# EAGLE board relay-shield (EAGLE 6.6.0)
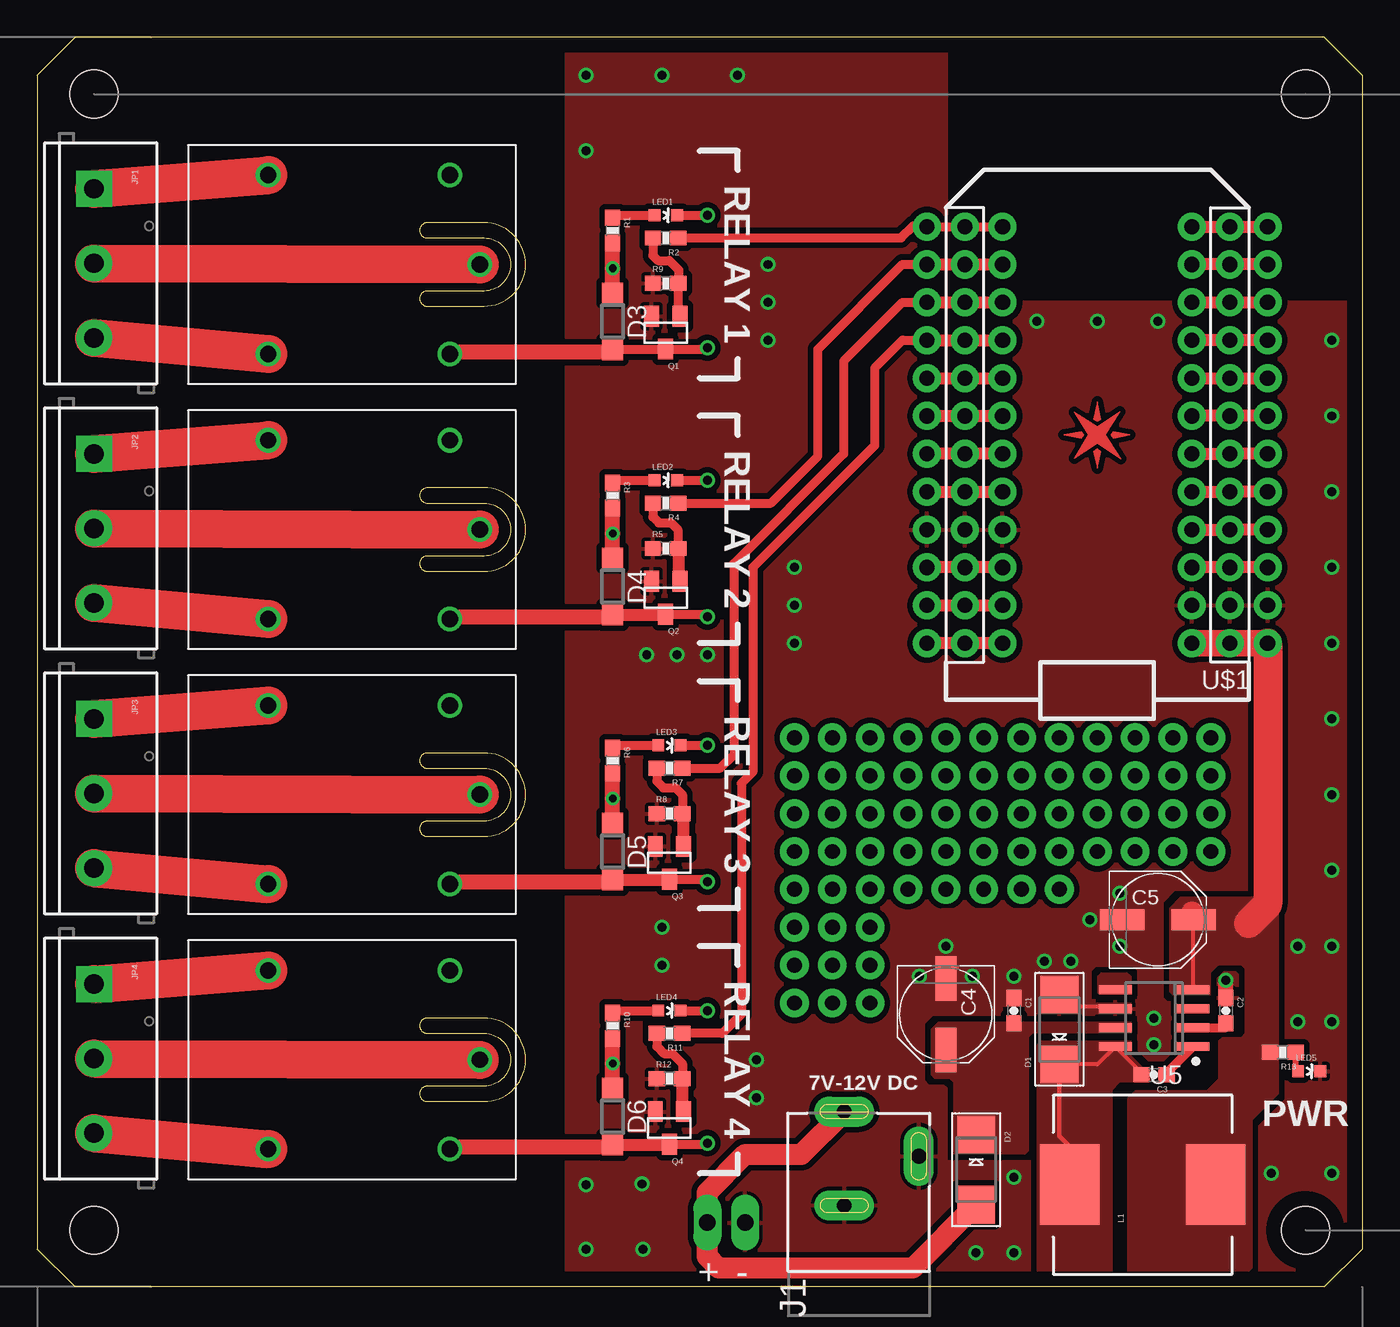
[diagram p0: board, top side]
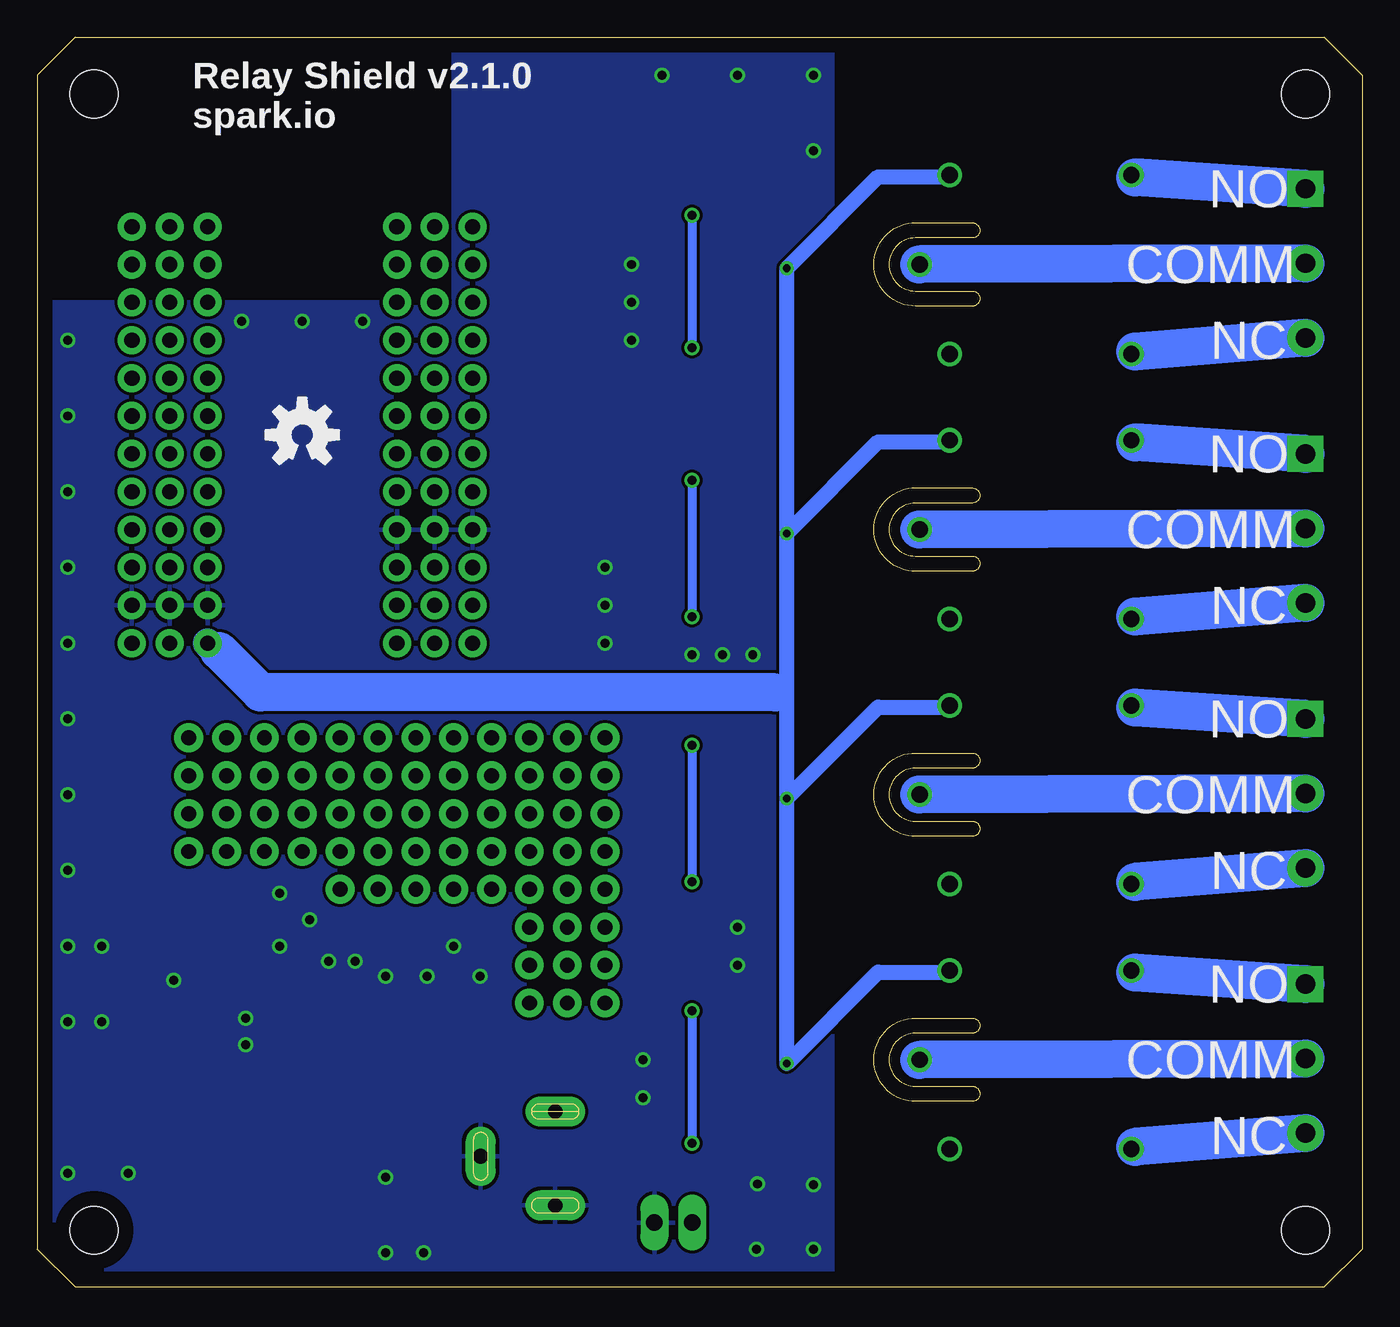
[diagram p1: board, bottom side, seen from below]

Size 88.9 x 83.82 mm. Coordinates in mm from the lower left corner, seen from the top.
Outline: 86.36,83.82 2.54,83.82 0,81.28 0,2.54 2.54,0 86.36,0 88.9,2.54 88.9,81.28 86.36,83.82
Outline: 26.16,70.36 29.97,70.36 arc-90 31.75,68.58 arc-90 29.97,66.8 26.16,66.8 arc180 26.16,65.79 29.97,65.79 arc90 32.77,68.58 arc85 30.23,71.37 26.16,71.37 arc180 26.16,70.36
Outline: 26.16,52.58 29.97,52.58 arc-90 31.75,50.8 arc-90 29.97,49.02 26.16,49.02 arc180 26.16,48.01 29.97,48.01 arc90 32.77,50.8 arc85 30.23,53.59 26.16,53.59 arc180 26.16,52.58
Outline: 26.16,34.8 29.97,34.8 arc-90 31.75,33.02 arc-90 29.97,31.24 26.16,31.24 arc180 26.16,30.23 29.97,30.23 arc90 32.77,33.02 arc85 30.23,35.81 26.16,35.81 arc180 26.16,34.8
Outline: 26.16,17.02 29.97,17.02 arc-90 31.75,15.24 arc-90 29.97,13.46 26.16,13.46 arc180 26.16,12.45 29.97,12.45 arc90 32.77,15.24 arc85 30.23,18.03 26.16,18.03 arc180 26.16,17.02
Copper layers (1*16): Top 0.035mm / dielectric 1.5mm / Bottom 0.035mm
Design rules "default *": minimum track width 10mil, minimum drill 24mil, track to track 8mil, track to pad 8mil, pad to pad 8mil, via to via 8mil, smd to smd 8mil, copper to edge 40mil, drill to drill 8mil, minimum pad ring 10mil, minimum via ring 8mil, stop-mask expansion 4mil, vias tented up to drill 25mil, thermal gap 10mil
Holes 3.2 mm at 3.81,80.01 85.09,80.01 85.09,3.81 3.81,3.81

## Footprints (pad centres in the part's own frame; a part is rotated, then mirrored left to right if it is on the bottom)
0603-CAP = smd 1.1 x 1: 1 -0.85,0; 2 0.85,0
PANASONIC_D = smd 3 x 1.4: + 2.4,0; - -2.4,0
SMADIODE = smd 2.54 x 2.54: A 2.349,0; C -2.349,0
SOD123 = smd 1.4 x 1.4: A 1.9,0; C -1.9,0
POWER_JACK_SLOT = drill 1 pad 2 long: GND@1 2.58,7.5; GND@2 7.58,10.8; PWR 2.58,13.8
SCREWTERMINAL-5MM-3 = drill 1.3 pad 2.413 square: 1 0,0 | drill 1.3 pad 2.413: 2 5,0; 3 10,0
1X02_LONGPADS = drill 1.118 pad 1.88 long: 1 0,0; 2 2.54,0
CDRH125 = smd 5.4 x 4: 1 0,4.9; 2 0,-4.9
LED-0603 = smd 0.8 x 0.8: A 0,-0.75; C 0,0.75
SOT23 = smd 1 x 1.4: 1 -0.95,-1.1; 2 0.95,-1.1; 3 0,1.1
0603-RES = smd 1.1 x 1: 1 -0.85,0; 2 0.85,0
JS1-5V-F = drill 1.1: CLOSED -6.096,-5.994; COIL1 6.096,5.994; COIL2 6.096,-5.994; COMMON 8.103,0; OPEN -6.096,5.994
SO08 = smd 0.6 x 2.2: 1 -1.905,-2.6; 2 -0.635,-2.6; 3 0.635,-2.6; 4 1.905,-2.6; 5 1.905,2.6; 6 0.635,2.6; 7 -0.635,2.6; 8 -1.905,2.6
SPARK_CORE_STACKABLE = drill 1.016 pad 1.88: 1 -8.89,13.97; 2 -8.89,11.43; 3 -8.89,8.89; 4 -8.89,6.35; 5 -8.89,3.81; 6 -8.89,1.27; 7 -8.89,-1.27; 8 -8.89,-3.81; 9 -8.89,-6.35; 10 -8.89,-8.89; 11 -8.89,-11.43; 12 -8.89,-13.97; 13 8.89,-13.97; 14 8.89,-11.43; 15 8.89,-8.89; 16 8.89,-6.35; 17 8.89,-3.81; 18 8.89,-1.27; 19 8.89,1.27; 20 8.89,3.81; 21 8.89,6.35; 22 8.89,8.89; 23 8.89,11.43; 24 8.89,13.97; #1 -6.35,13.97; #2 -6.35,11.43; #3 -6.35,8.89; #4 -6.35,6.35; #5 -6.35,3.81; #6 -6.35,1.27; #7 -6.35,-1.27; #8 -6.35,-3.81; #9 -6.35,-6.35; #10 -6.35,-8.89; #11 -6.35,-11.43; #12 -6.35,-13.97; #13 11.43,-13.97; #14 11.43,-11.43; #15 11.43,-8.89; #16 11.43,-6.35; #17 11.43,-3.81; #18 11.43,-1.27; #19 11.43,1.27; #20 11.43,3.81; #21 11.43,6.35; #22 11.43,8.89; #23 11.43,11.43; #24 11.43,13.97; @1 -11.43,13.97; @2 -11.43,11.43; @3 -11.43,8.89; @4 -11.43,6.35; @5 -11.43,3.81; @6 -11.43,1.27; @7 -11.43,-1.27; @8 -11.43,-3.81; @9 -11.43,-6.35; @10 -11.43,-8.89; @11 -11.43,-11.43; @12 -11.43,-13.97; @13 6.35,-13.97; @14 6.35,-11.43; @15 6.35,-8.89; @16 6.35,-6.35; @17 6.35,-3.81; @18 6.35,-1.27; @19 6.35,1.27; @20 6.35,3.81; @21 6.35,6.35; @22 6.35,8.89; @23 6.35,11.43; @24 6.35,13.97

## Placement (x,y rotation side)
C1  0.1uF  [0603-CAP]  65.53,18.54 270 top
C2  10nF  [0603-CAP]  79.76,18.54 270 top
C3  10nF  [0603-CAP]  74.93,14.22 180 top
C4  100uF, 16V  [PANASONIC_D]  60.96,18.29 270 top
C5  56uF, 10V  [PANASONIC_D]  75.18,24.64 0 top
D1  B230  [SMADIODE]  68.58,17.27 90 top
D2  B230  [SMADIODE]  62.99,7.87 270 top
D3  [SOD123]  38.61,64.77 270 top
D4  [SOD123]  38.61,46.99 270 top
D5  [SOD123]  38.61,29.21 270 top
D6  [SOD123]  38.61,11.43 270 top
E$1  [SPARK_LOGO_PLUS_PLANE]  71.12,57.15 0 top
J1  POWER_JACKSLT  [POWER_JACK_SLOT]  51.56,-2.03 0 top
JP1  [SCREWTERMINAL-5MM-3]  3.81,73.66 270 top
JP2  [SCREWTERMINAL-5MM-3]  3.81,55.88 270 top
JP3  [SCREWTERMINAL-5MM-3]  3.81,38.1 270 top
JP4  [SCREWTERMINAL-5MM-3]  3.81,20.32 270 top
JP5  M02PTH3  [1X02_LONGPADS]  47.5,4.32 180 top
L1  CDRH125NP-470M  [CDRH125]  74.17,6.86 90 top
LED1  RED  [LED-0603]  42.16,71.88 270 top
LED2  RED  [LED-0603]  42.16,54.1 270 top
LED3  RED  [LED-0603]  42.42,36.32 270 top
LED4  RED  [LED-0603]  42.42,18.54 270 top
LED5  BLUE  [LED-0603]  85.34,14.48 270 top
LOGO1  OSHW-LOGOM  [OSHW-LOGO-M]  71.12,57.15 0 bottom
Q1  MPSA42  [SOT23]  42.16,64.01 180 top
Q2  MPSA42  [SOT23]  42.16,46.23 180 top
Q3  MPSA42  [SOT23]  42.42,28.45 180 top
Q4  MPSA42  [SOT23]  42.42,10.67 180 top
R1  1K  [0603-RES]  38.61,70.87 270 top
R2  1K  [0603-RES]  42.16,70.36 180 top
R3  1K  [0603-RES]  38.61,53.09 270 top
R4  1K  [0603-RES]  42.16,52.58 180 top
R5  10K  [0603-RES]  42.16,49.53 0 top
R6  1K  [0603-RES]  38.61,35.31 270 top
R7  1K  [0603-RES]  42.42,34.8 180 top
R8  10K  [0603-RES]  42.42,31.75 0 top
R9  10K  [0603-RES]  42.16,67.31 0 top
R10  1K  [0603-RES]  38.61,17.53 270 top
R11  1K  [0603-RES]  42.42,17.02 180 top
R12  10K  [0603-RES]  42.42,13.97 0 top
R13  1K  [0603-RES]  83.57,15.75 180 top
U1  RELAYPANASONIC-JS  [JS1-5V-F]  21.59,68.58 0 top
U2  RELAYPANASONIC-JS  [JS1-5V-F]  21.59,50.8 0 top
U3  RELAYPANASONIC-JS  [JS1-5V-F]  21.59,33.02 0 top
U4  RELAYPANASONIC-JS  [JS1-5V-F]  21.59,15.24 0 top
U5  LM2672  [SO08]  74.93,18.03 90 top
U$1  SPARK_CORE  [SPARK_CORE_STACKABLE]  71.12,57.15 180 top

## Library data of the parts
C1 = SparkFun-Capacitors; PROD_ID: CAP-08604
C2-C5 = SparkFun-Capacitors
D1 D2 = adafruit
D3-D6 = diode
E$1 J1 LOGO1 U1-U5 U$1 = Spark
JP1-JP5 = SparkFun-Connectors
L1 R1-R13 = SparkFun-Passives
LED1-LED5 = SparkFun-LED
Q1-Q4 = SparkFun-DiscreteSemi; PROD_ID: TRANS-09116

## Nets
+5V: C5.+ D3.C D4.C D5.C D6.C L1.2 R1.2 R3.2 R6.2 R10.2 R13.2 U1.COIL1 U2.COIL1 U3.COIL1 U4.COIL1 U5.4 U$1.1 U$1.#1 U$1.@1
GND: C1.1 C2.1 C4.- C5.- D1.A J1.GND@1 J1.GND@2 JP5.1 LED5.C Q1.2 Q2.2 Q3.2 Q4.2 R5.1 R8.1 R9.1 R12.1 U5.6 U$1.2 U$1.21 U$1.#2 U$1.#21 U$1.@2 U$1.@21
MAIN1: JP1.2 U1.COMMON
MAIN2: JP2.2 U2.COMMON
MAIN3: JP3.2 U3.COMMON
MAIN4: JP4.2 U4.COMMON
N$1: D3.A LED1.C Q1.3 U1.COIL2
N$2: Q2.1 R4.2 R5.2
N$3: Q1.1 R2.2 R9.2
N$4: LED1.A R1.1
N$5: D4.A LED2.C Q2.3 U2.COIL2
N$6: LED2.A R3.1
N$7: Q3.1 R7.2 R8.2
N$8: D5.A LED3.C Q3.3 U3.COIL2
N$9: LED3.A R6.1
N$10: Q4.1 R11.2 R12.2
N$11: D6.A LED4.C Q4.3 U4.COIL2
N$12: LED4.A R10.1
N$13: U$1.17 U$1.#17 U$1.@17
N$14: C1.2 C4.+ D2.C U5.7
N$15: U$1.18 U$1.#18 U$1.@18
N$16: LED5.A R13.1
N$17: U$1.19 U$1.#19 U$1.@19
N$18: U$1.20 U$1.#20 U$1.@20
N$19: U$1.22 U$1.#22 U$1.@22
N$20: U$1.23 U$1.#23 U$1.@23
N$21: U$1.24 U$1.#24 U$1.@24
N$22: U$1.12 U$1.#12 U$1.@12
N$23: U$1.11 U$1.#11 U$1.@11
N$24: U$1.10 U$1.#10 U$1.@10
N$25: U$1.9 U$1.#9 U$1.@9
N$26: U$1.8 U$1.#8 U$1.@8
N$27: U$1.7 U$1.#7 U$1.@7
N$28: U$1.6 U$1.#6 U$1.@6
N$29: U$1.5 U$1.#5 U$1.@5
N$30: U$1.4 U$1.#4 U$1.@4
N$31: U$1.3 U$1.#3 U$1.@3
N$32: D2.A J1.PWR JP5.2
N$33: C3.1 U5.1
N$34: C3.2 D1.C L1.1 U5.8
N$35: U5.5
N$36: C2.2 U5.2
NC1: JP1.3 U1.CLOSED
NC2: JP2.3 U2.CLOSED
NC3: JP3.3 U3.CLOSED
NC4: JP4.3 U4.CLOSED
NO1: JP1.1 U1.OPEN
NO2: JP2.1 U2.OPEN
NO3: JP3.1 U3.OPEN
NO4: JP4.1 U4.OPEN
RELAY1: R2.1 U$1.13 U$1.#13 U$1.@13
RELAY2: R4.1 U$1.14 U$1.#14 U$1.@14
RELAY3: R7.1 U$1.15 U$1.#15 U$1.@15
RELAY4: R11.1 U$1.16 U$1.#16 U$1.@16

## Tracks (layer width: path | path; a pad name or v marks a point on that pad's centre or on a via)
+5V  (via drill 0.51)
  Top 0.254: C5.+ 77.53,24.58 U5.4
  Top 1.016: D6.C v38.61,14.99 R10.2 | D5.C v38.61,32.77 R6.2 | D4.C v38.61,50.55 R3.2 | D3.C v38.61,68.33 R1.2
  Top 1.422: 77.47,25.15 77.58,25.03 C5.+
  Top 1.778: U$1.@1 U$1.1 U$1.#1
  Top 1.93: U$1.@1 82.55,25.65 81.28,24.38
  Bottom 1.016: v38.61,32.77 32.48,38.9 27.69,38.9 U3.COIL1 | v38.61,50.55 32.48,56.67 27.69,56.67 U2.COIL1 | v38.61,32.77 v38.61,14.99 32.48,21.11 27.69,21.11 U4.COIL1 | v38.61,32.77 38.61,39.88 | 38.61,39.88 v38.61,50.55 | v38.61,50.55 v38.61,68.33 32.48,74.45 27.69,74.45 U1.COIL1 | 39.37,39.88 38.61,39.88
  Bottom 1.93: 76.71,42.67 76.96,42.67 U$1.#1
  Bottom 2.54: 39.37,39.88 73.91,39.88 76.71,42.67
  pour Top (no thermals): 73.15,1.02 73.15,12.7 73.66,13.21 78.49,13.21 79.25,13.97 79.25,16.51 79.5,16.76 80.77,16.76 81.03,17.02 81.03,21.34 80.77,21.59 79.25,21.59 78.74,21.08 78.74,19.56 76.2,19.56 75.95,19.81 75.95,25.4 76.71,26.16 82.3,26.16 83.31,25.15 83.31,12.95 81.53,11.18 81.53,1.27 81.28,1.02
GND  (via drill 0.6)
  Top 0.254: C4.- 61.7,21.42 | U5.6 72.2,18.8 68.33,18.8 68.58,19.05 D1.A
  Top 1.016: C2.1 v79.76,20.57
  other vias: 36.83,76.2 36.83,81.28 49.02,63.5 48.26,12.7 40.59,6.91 49.02,66.04 86.87,22.86 86.87,27.94 86.87,33.02 86.87,38.1 60.96,22.86 86.87,43.18 49.02,68.58 48.26,15.24 36.83,2.54 36.83,6.86 86.87,17.78 86.87,7.62 40.64,2.54 84.58,17.78 82.8,7.62 74.93,18.03 65.53,2.29 65.53,7.37 65.53,20.83 70.61,24.64 72.64,26.42 72.64,22.86 59.18,20.83 62.74,20.83 74.93,16.26 67.56,21.84 69.34,21.84 84.58,22.86 50.8,48.26 50.8,45.72 50.8,43.18 41.91,24.13 41.91,21.59 44.96,42.42 42.93,42.42 40.89,42.42 41.91,81.28 46.99,81.28 86.87,48.26 86.87,53.34 86.87,58.42 86.87,63.5 62.99,2.29 67.06,64.77 75.18,64.77 71.12,64.77
  pour Bottom (rank 2): 35.56,-2.54 35.56,86.36 60.96,86.36 60.96,66.04 88.9,66.04 88.9,-2.54
  pour Top (isolate 0.381, rank 2): 35.56,-2.54 35.56,86.36 60.96,86.36 60.96,66.04 88.9,66.04 88.9,-2.54
  pour Top (no thermals): 59.44,19.05 62.48,19.05 62.48,22.61 59.44,22.61
  pour Top (no thermals): 58.67,18.29 64.26,18.29 64.77,18.8 66.29,18.8 66.8,18.29 73.41,18.29 73.41,19.05 70.87,19.05 70.61,19.3 70.61,21.08 71.12,21.59 74.93,21.59 75.18,21.84 75.18,26.67 74.42,27.43 71.12,27.43 69.09,25.4 60.71,25.4 58.42,23.11 58.42,18.54
MAIN1
  Top 2.54: JP1.2 U1.COMMON
  Bottom 2.54: JP1.2 29.72,68.58
MAIN2
  Top 2.54: JP2.2 U2.COMMON
  Bottom 2.54: JP2.2 29.72,50.8
MAIN3
  Top 2.54: JP3.2 U3.COMMON
  Bottom 2.54: JP3.2 29.72,33.02
MAIN4
  Top 2.54: JP4.2 U4.COMMON
  Bottom 2.54: JP4.2 29.72,15.24
N$1  (via drill 0.6)
  Top 0.61: D3.A 42.13,62.87 Q1.3 44.87,62.91 v44.96,62.99 | LED1.C v44.96,71.88
  Top 0.813: 38.44,62.7 D3.A
  Top 1.016: 38.44,62.7 27.69,62.7 U1.COIL2
  Bottom 0.61: v44.96,71.88 v44.96,62.99
N$2
  Top 0.61: R4.2 41.31,51.65 41.71,51.26 42.52,51.26 42.98,50.8 42.98,49.57 R5.2
  Top 0.813: R5.2 43.01,47.43 Q2.1
N$3
  Top 0.61: Q1.1 43.01,65.21 R9.2 43.03,67.32 43.03,68.22 42.42,68.83 41.66,68.83 41.31,69.18 R2.2
N$4
  Top 0.61: R1.1 38.77,71.88 LED1.A
N$5  (via drill 0.6)
  Top 0.61: LED2.C v44.96,54.1 | Q2.3 44.79,45.13 v44.96,44.96
  Top 0.813: 38.44,44.92 D4.A 42.13,45.09 Q2.3
  Top 1.016: 38.44,44.92 27.69,44.92 U2.COIL2
  Bottom 0.61: v44.96,54.1 v44.96,44.96
N$6
  Top 0.61: R3.1 38.77,54.1 LED2.A
N$7
  Top 0.61: R7.2 41.57,33.92 42.01,33.48 42.82,33.48 43.28,33.02 43.28,31.76 R8.2
  Top 0.813: Q3.1 43.37,31.65 R8.2
N$8  (via drill 0.6)
  Top 0.61: LED3.C v44.96,36.32 | Q3.3 44.79,27.35 v44.96,27.18
  Top 0.813: 38.44,27.14 D5.A 42.38,27.31 Q3.3
  Top 1.016: 38.44,27.14 27.69,27.14 U3.COIL2
  Bottom 0.61: v44.96,36.32 v44.96,27.18
N$9
  Top 0.61: R6.1 38.77,36.32 LED3.A
N$10
  Top 0.61: R11.2 41.57,16.14 42.06,15.65 42.62,15.65 43.28,14.99 43.28,13.98 R12.2
  Top 0.813: R12.2 43.27,11.87 Q4.1
N$11  (via drill 0.6)
  Top 0.61: LED4.C v44.96,18.54 | Q4.3 44.87,9.57 v44.96,9.65
  Top 0.813: 38.44,9.37 D6.A 42.38,9.53 Q4.3
  Top 1.016: 38.44,9.37 27.69,9.37 U4.COIL2
  Bottom 0.61: v44.96,18.54 v44.96,9.65
N$12
  Top 0.61: R10.1 38.77,18.54 LED4.A
N$13
  Top 0.813: U$1.#17 U$1.17 U$1.@17
N$14
  Top 0.254: U5.7 72.2,17.27 | 65.53,18.03 C1.2
  pour Top (no thermals): 61.47,8.89 66.29,8.89 66.55,9.14 66.55,16.76 66.8,17.02 73.41,17.02 73.41,17.78 60.45,17.78 59.94,17.27 59.94,14.22 60.2,13.97 61.21,13.97 61.47,13.72
N$15
  Top 0.813: U$1.#18 U$1.18 U$1.@18
N$16
  Top 0.406: R13.1 84.42,14.66 LED5.A
N$17
  Top 0.813: U$1.@19 U$1.19 U$1.#19
N$18
  Top 0.813: U$1.#20 U$1.20 U$1.@20
N$19
  Top 0.813: U$1.@22 U$1.22 U$1.#22
N$20
  Top 0.813: U$1.#23 U$1.23 U$1.@23
N$21
  Top 0.813: U$1.@24 U$1.24 U$1.#24
N$22
  Top 0.813: U$1.#12 U$1.12 U$1.@12
N$23
  Top 0.813: U$1.@11 U$1.11 U$1.#11
N$24
  Top 0.813: U$1.#10 U$1.10 U$1.@10
N$25
  Top 0.813: U$1.@9 U$1.9 U$1.#9
N$26
  Top 0.813: U$1.#8 U$1.8 U$1.@8
N$27
  Top 0.813: U$1.@7 U$1.7 U$1.#7
N$28
  Top 0.813: U$1.@6 80.52,55.88 U$1.6 U$1.#6
N$29
  Top 0.813: U$1.#5 U$1.5 U$1.@5
N$30
  Top 0.813: U$1.#4 U$1.4 U$1.@4
N$31
  Top 0.813: U$1.@3 U$1.3 U$1.#3
N$32
  Top 1.422: J1.PWR 51.26,8.89 47.5,8.89 44.96,6.35 JP5.2 44.96,2.03 45.72,1.27 58.74,1.27 D2.A
N$33
  Top 0.254: 77.53,15.97 U5.1
  Top 0.61: C3.1 75.78,14.38 U5.1
N$34
  Top 0.254: L1.1 69.27,9.41 | D1.C 71.12,14.92 U5.8 74.08,14.38 C3.2
  Top 0.305: 69.27,9.41 68.58,10.1 D1.C
  pour Top (no thermals): 73.41,16.51 67.31,16.51 67.06,16.26 67.06,0.76 67.31,0.51 71.88,0.51 72.14,0.76 72.14,13.21 72.64,13.72 74.68,13.72 74.68,14.73 74.17,14.73 73.41,15.49
N$35
  pour Top (no thermals): 71.12,19.68 71.12,20.83 71.37,21.08 73.15,21.08 73.41,20.83 73.41,19.68
N$36
  Top 0.406: 80.01,17.4 C2.2
  Top 0.61: U5.2 79.76,17.4 C2.2
N$37  (via drill 1 pad 1.93)
  other vias: 73.66,36.83
N$38  (via drill 1 pad 1.93)
  other vias: 71.12,36.83
N$39  (via drill 1 pad 1.93)
  other vias: 68.58,36.83
N$40  (via drill 1 pad 1.93)
  other vias: 66.04,36.83
N$41  (via drill 1 pad 1.93)
  other vias: 63.5,36.83
N$42  (via drill 1 pad 1.93)
  other vias: 60.96,36.83
N$43  (via drill 1 pad 1.93)
  other vias: 58.42,36.83
N$44  (via drill 1 pad 1.93)
  other vias: 55.88,36.83
N$45  (via drill 1 pad 1.93)
  other vias: 53.34,36.83
N$46  (via drill 1 pad 1.93)
  other vias: 50.8,36.83
N$47  (via drill 1 pad 1.93)
  other vias: 50.8,34.29
N$48  (via drill 1 pad 1.93)
  other vias: 53.34,34.29
N$49  (via drill 1 pad 1.93)
  other vias: 55.88,34.29
N$50  (via drill 1 pad 1.93)
  other vias: 58.42,34.29
N$51  (via drill 1 pad 1.93)
  other vias: 60.96,34.29
N$52  (via drill 1 pad 1.93)
  other vias: 63.5,34.29
N$53  (via drill 1 pad 1.93)
  other vias: 66.04,34.29
N$54  (via drill 1 pad 1.93)
  other vias: 68.58,34.29
N$55  (via drill 1 pad 1.93)
  other vias: 71.12,34.29
N$56  (via drill 1 pad 1.93)
  other vias: 73.66,34.29
N$57  (via drill 1 pad 1.93)
  other vias: 73.66,31.75
N$58  (via drill 1 pad 1.93)
  other vias: 71.12,31.75
N$59  (via drill 1 pad 1.93)
  other vias: 68.58,31.75
N$60  (via drill 1 pad 1.93)
  other vias: 66.04,31.75
N$61  (via drill 1 pad 1.93)
  other vias: 63.5,31.75
N$62  (via drill 1 pad 1.93)
  other vias: 60.96,31.75
N$63  (via drill 1 pad 1.93)
  other vias: 58.42,31.75
N$64  (via drill 1 pad 1.93)
  other vias: 55.88,31.75
N$65  (via drill 1 pad 1.93)
  other vias: 53.34,31.75
N$66  (via drill 1 pad 1.93)
  other vias: 50.8,31.75
N$67  (via drill 1 pad 1.93)
  other vias: 50.8,29.21
N$68  (via drill 1 pad 1.93)
  other vias: 53.34,29.21
N$69  (via drill 1 pad 1.93)
  other vias: 55.88,29.21
N$70  (via drill 1 pad 1.93)
  other vias: 58.42,29.21
N$71  (via drill 1 pad 1.93)
  other vias: 60.96,29.21
N$72  (via drill 1 pad 1.93)
  other vias: 63.5,29.21
N$73  (via drill 1 pad 1.93)
  other vias: 66.04,29.21
N$74  (via drill 1 pad 1.93)
  other vias: 68.58,29.21
N$75  (via drill 1 pad 1.93)
  other vias: 71.12,29.21
N$76  (via drill 1 pad 1.93)
  other vias: 73.66,29.21
N$77  (via drill 1 pad 1.93)
  other vias: 50.8,26.67
N$78  (via drill 1 pad 1.93)
  other vias: 53.34,26.67
N$79  (via drill 1 pad 1.93)
  other vias: 55.88,26.67
N$80  (via drill 1 pad 1.93)
  other vias: 58.42,26.67
N$81  (via drill 1 pad 1.93)
  other vias: 60.96,26.67
N$82  (via drill 1 pad 1.93)
  other vias: 63.5,26.67
N$83  (via drill 1 pad 1.93)
  other vias: 66.04,26.67
N$84  (via drill 1 pad 1.93)
  other vias: 68.58,26.67
N$85  (via drill 1 pad 1.93)
  other vias: 50.8,24.13
N$86  (via drill 1 pad 1.93)
  other vias: 53.34,24.13
N$87  (via drill 1 pad 1.93)
  other vias: 55.88,24.13
N$88  (via drill 1 pad 1.93)
  other vias: 50.8,21.59
N$89  (via drill 1 pad 1.93)
  other vias: 53.34,21.59
N$90  (via drill 1 pad 1.93)
  other vias: 55.88,21.59
N$91  (via drill 1 pad 1.93)
  other vias: 50.8,19.05
N$92  (via drill 1 pad 1.93)
  other vias: 53.34,19.05
N$93  (via drill 1 pad 1.93)
  other vias: 55.88,19.05
N$94  (via drill 1 pad 1.93)
  other vias: 76.2,36.83
N$95  (via drill 1 pad 1.93)
  other vias: 78.74,36.83
N$96  (via drill 1 pad 1.93)
  other vias: 78.74,34.29
N$97  (via drill 1 pad 1.93)
  other vias: 76.2,34.29
N$98  (via drill 1 pad 1.93)
  other vias: 76.2,31.75
N$99  (via drill 1 pad 1.93)
  other vias: 78.74,31.75
N$100  (via drill 1 pad 1.93)
  other vias: 78.74,29.21
N$101  (via drill 1 pad 1.93)
  other vias: 76.2,29.21
NC1
  Top 2.54: JP1.3 U1.CLOSED
  Bottom 2.54: JP1.3 15.24,62.74
NC2
  Top 2.54: JP2.3 U2.CLOSED
  Bottom 2.54: JP2.3 15.24,44.96
NC3
  Top 2.54: JP3.3 U3.CLOSED
  Bottom 2.54: JP3.3 15.24,27.18
NC4
  Top 2.54: JP4.3 U4.CLOSED
  Bottom 2.54: JP4.3 15.24,9.4
NO1
  Top 2.54: JP1.1 U1.OPEN
  Bottom 2.54: JP1.1 15.24,74.42
NO2
  Top 2.54: JP2.1 U2.OPEN
  Bottom 2.54: JP2.1 15.24,56.64
NO3
  Top 2.54: JP3.1 U3.OPEN
  Bottom 2.54: JP3.1 15.24,38.86
NO4
  Top 2.54: JP4.1 U4.OPEN
  Bottom 2.54: JP4.1 15.24,21.08
RELAY1
  Top 0.61: R2.1 57.96,70.36 58.78,71.17 59.64,71.17 U$1.#13 U$1.13 U$1.@13
RELAY2
  Top 0.61: R4.1 49.23,52.58 52.38,55.73 52.38,62.89 58.06,68.58 U$1.#14
  Top 0.813: U$1.#14 U$1.14 U$1.@14
RELAY3
  Top 0.61: R7.1 45.82,34.8 46.74,35.71 46.74,48.51 54.1,55.88 54.1,62.08 58.06,66.04 U$1.#15
  Top 0.813: U$1.#15 U$1.15 U$1.@15
RELAY4
  Top 0.61: U$1.#16 58.06,63.5 56.19,61.62 56.19,56.44 48.01,48.26 48.01,34.54 47.24,33.78 47.24,18.29 45.97,17.02 R11.1
  Top 0.813: U$1.#16 U$1.16 U$1.@16

## Text on the board
tPlace: RELAY 1 | RELAY 2 | RELAY 3 | RELAY 4 | 7V-12V DC | PWR | + | -
bPlace: Relay Shield v2.1.0 / spark.io | NO | COMM | NC | NO | COMM | NC | NO | COMM | NC | NO | COMM | NC